# EAGLE board Sam PCB Assignment (EAGLE 5.12)
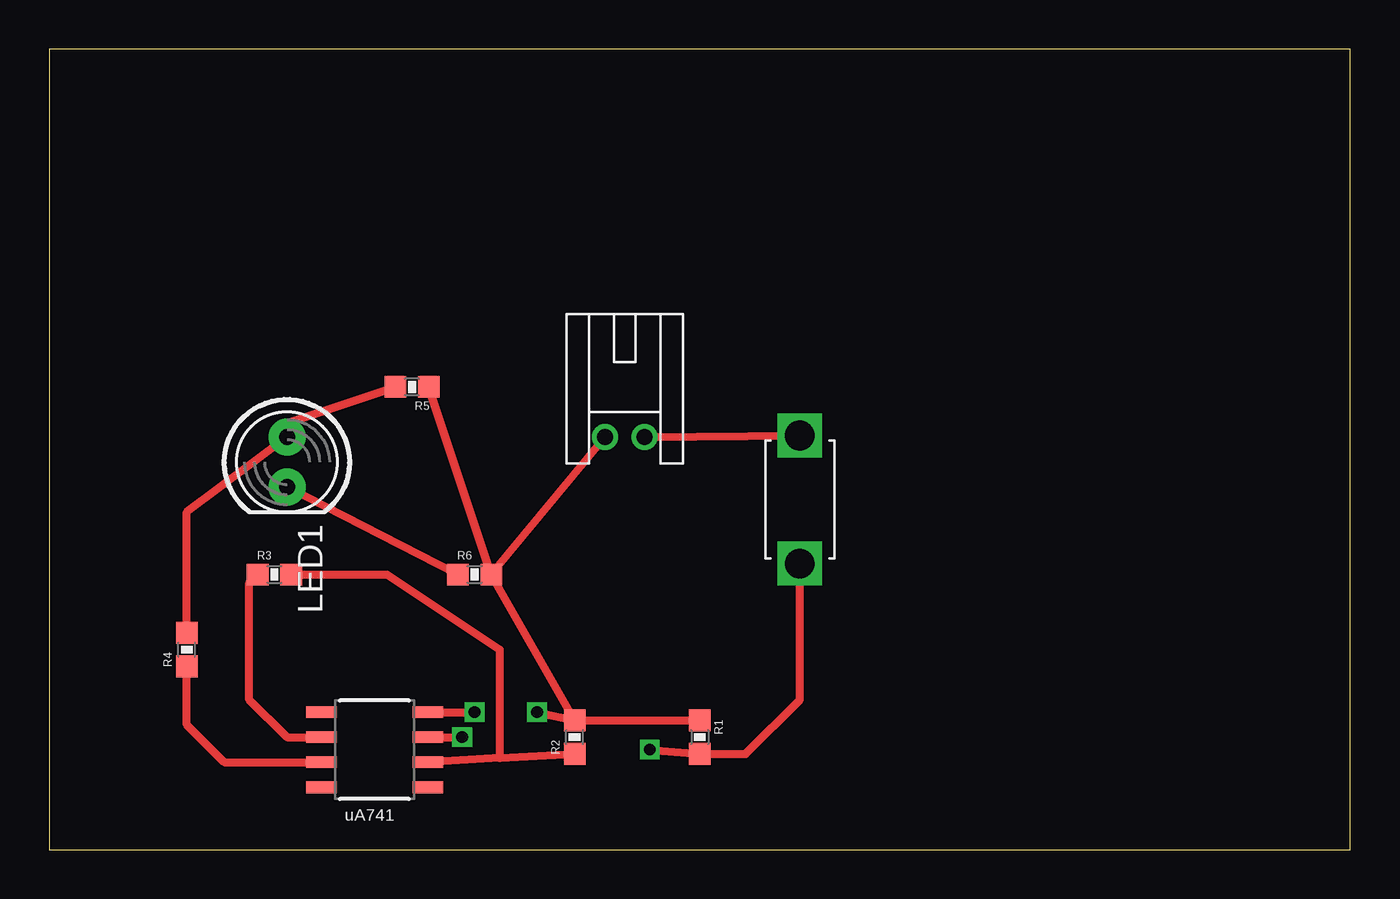
[diagram p0: board, top side]
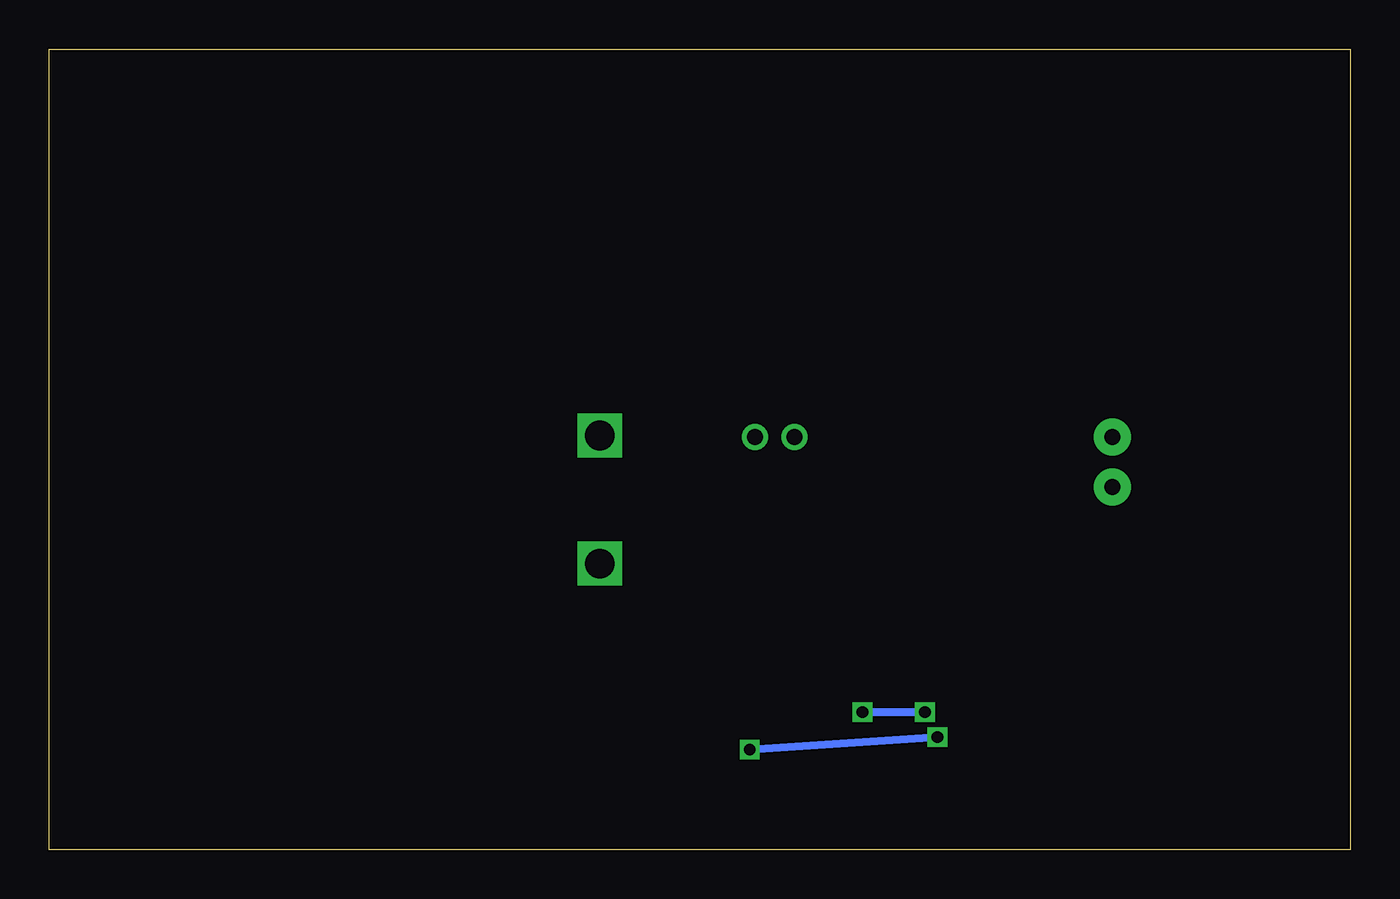
[diagram p1: board, bottom side, seen from below]

Size 66.04 x 40.64 mm. Coordinates in mm from the lower left corner, seen from the top.
Outline: 0,0 66.04,0 66.04,40.64 0,40.64 0,0
Copper layers (1*16): Top 0.035mm / dielectric 1.5mm / Bottom 0.035mm
Design rules "default": minimum track width 10mil, minimum drill 24mil, track to track 8mil, track to pad 8mil, pad to pad 8mil, via to via 8mil, smd to smd 8mil, copper to edge 40mil, drill to drill 8mil, minimum pad ring 10mil, minimum via ring 8mil, stop-mask expansion 4mil, vias tented up to drill 0mil, thermal gap 10mil

## Footprints (pad centres in the part's own frame; a part is rotated, then mirrored left to right if it is on the bottom)
JST-2-PH-TH = drill 0.8 round: 1 -1,-6.35; 2 1,-6.35
LED5MM = drill 0.813 pad 1.88 round: A -1.27,0; K 1.27,0
0603 = smd 1.1 x 1.1: 1 -0.85,0; 2 0.85,0
TACTILE_SWITCH = drill 1.5 square: 1 -3.25,0; 2 3.25,0
UA741-D(R-PDSO-G8) = smd 1.55 x 0.6: 1 -2.7,1.905; 2 -2.7,0.635; 3 -2.7,-0.635; 4 -2.7,-1.905; 5 2.7,1.905; 6 2.7,0.635; 7 2.7,-0.635; 8 2.7,-1.905

## Placement (x,y rotation side)
JP1  [JST-2-PH-TH]  29.21,27.3 0 top
LED1  [LED5MM]  12.07,19.69 270 top
R1  1000  [0603]  33.02,5.71 270 top
R2  1000  [0603]  26.67,5.71 90 top
R3  1000  [0603]  11.43,13.97 0 top
R4  100  [0603]  6.99,10.16 90 top
R5  1000  [0603]  18.41,23.49 180 top
R6  [0603]  21.59,13.97 0 top
U$1  TACTILE_SWITCH  [TACTILE_SWITCH]  38.1,17.78 90 top
U$2  UA7411  [UA741-D(R-PDSO-G8)]  16.51,5.08 180 top

## Library data of the parts
JP1 LED1 R1-R6 U$1 = GibbotV5 (1)
U$2 = SLAM

## Nets
5V: R3.1 U$2.7
GND: JP1.1 R1.1 R2.2 R5.1 R6.2 U$2.4
N$1: JP1.2 U$1.2
N$2: R1.2 U$1.1 U$2.3
N$5: R2.1 R3.2 U$2.2
N$8: R4.1 U$2.6
N$9: LED1.A R4.2 R5.2
N$11: LED1.K R6.1

## Tracks (layer width: path | path; a pad name or v marks a point on that pad's centre or on a via)
5V
  Top 0.406: U$2.7 12.07,5.71 10.16,7.62 10.16,13.55 R3.1
GND  (via drill 0.6)
  Top 0.406: R2.2 R1.1 | v24.77,6.99 R2.2 | U$2.4 v21.59,6.99 | R2.2 R6.2 | R6.2 JP1.1 | R6.2 R5.1
  Bottom 0.406: v21.59,6.99 v24.77,6.99
N$1
  Top 0.406: JP1.2 U$1.2
N$2  (via drill 0.6)
  Top 0.406: v30.48,5.08 R1.2 35.34,4.87 38.1,7.62 U$1.1 | U$2.3 v20.96,5.71
  Bottom 0.406: v20.96,5.71 v30.48,5.08
N$5
  Top 0.406: 22.88,4.65 U$2.2 | 22.88,4.65 R2.1 | 22.88,4.65 22.86,4.68 22.86,10.16 17.14,13.97 R3.2
N$8
  Top 0.406: R4.1 6.99,6.35 8.89,4.45 U$2.6
N$9
  Top 0.406: R4.2 6.99,17.14 LED1.A 11.85,21.59 R5.2
N$11
  Top 0.406: R6.1 LED1.K